# Altium PCB 9-123-305-Ivchenko.PcbDoc
Units mil, origin at the board's own origin, x right, y up, seen from the top; angles counter-clockwise.
Board outline 5062.99 x 2822.83 mil, 2 copper layers (Top Layer, Top, Bottom Layer, Bottom); 17 components, 11 nets, 61 pads, 23 vias.
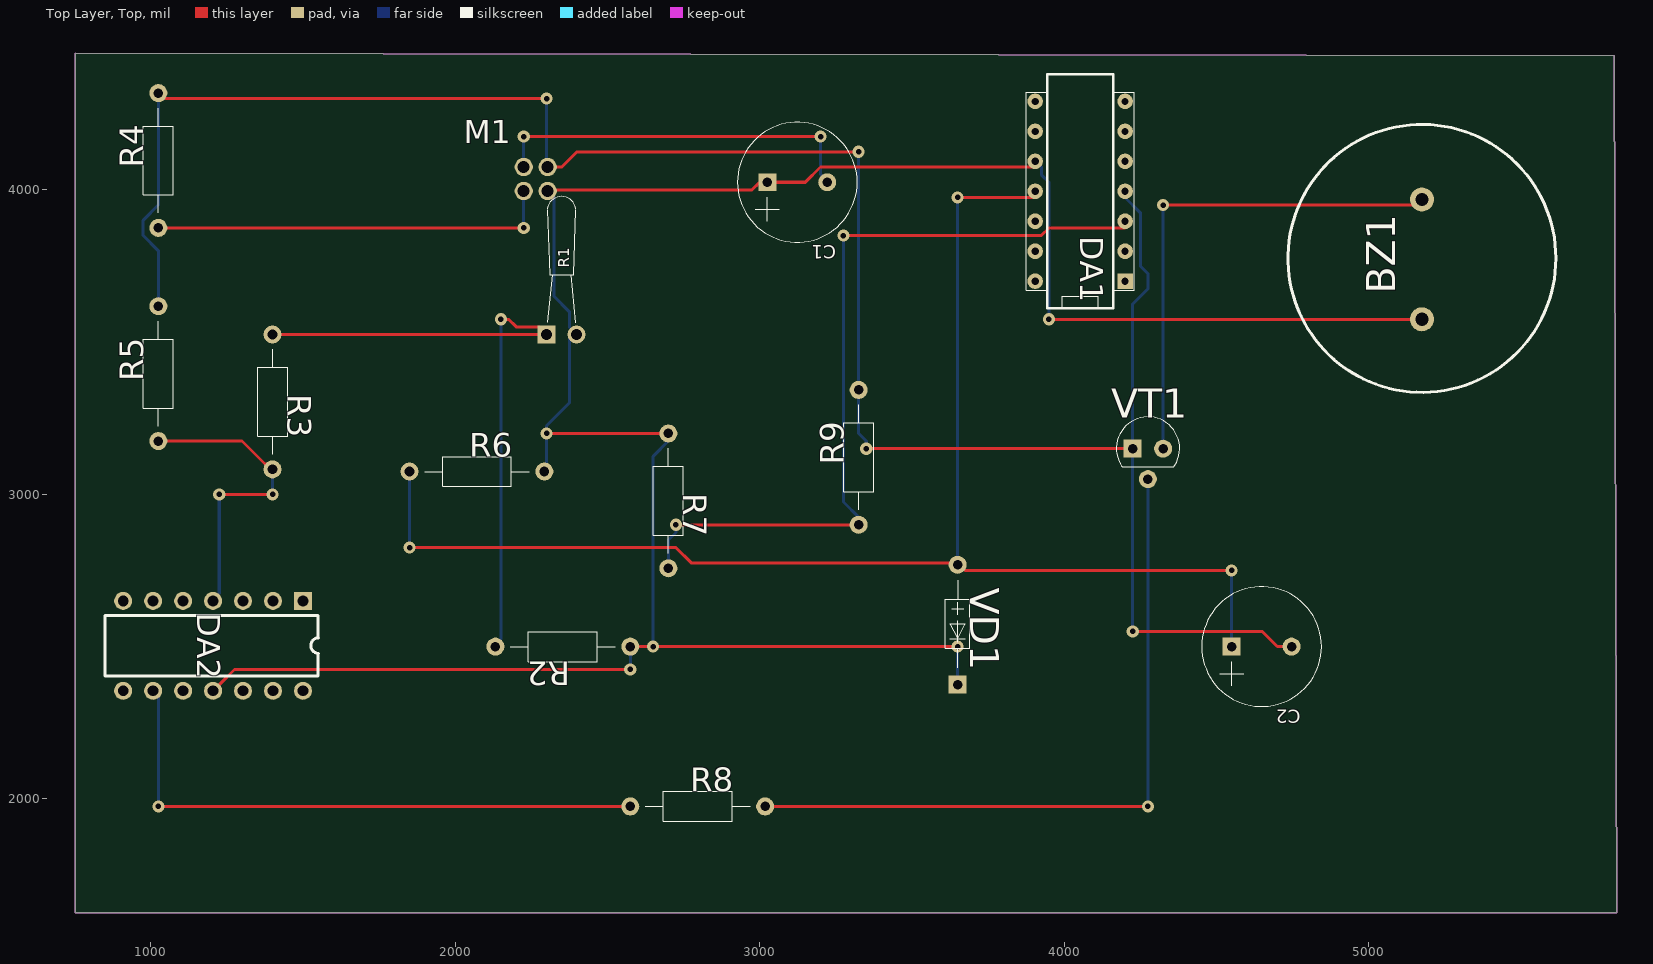
[diagram p0: Top Layer, Top view]
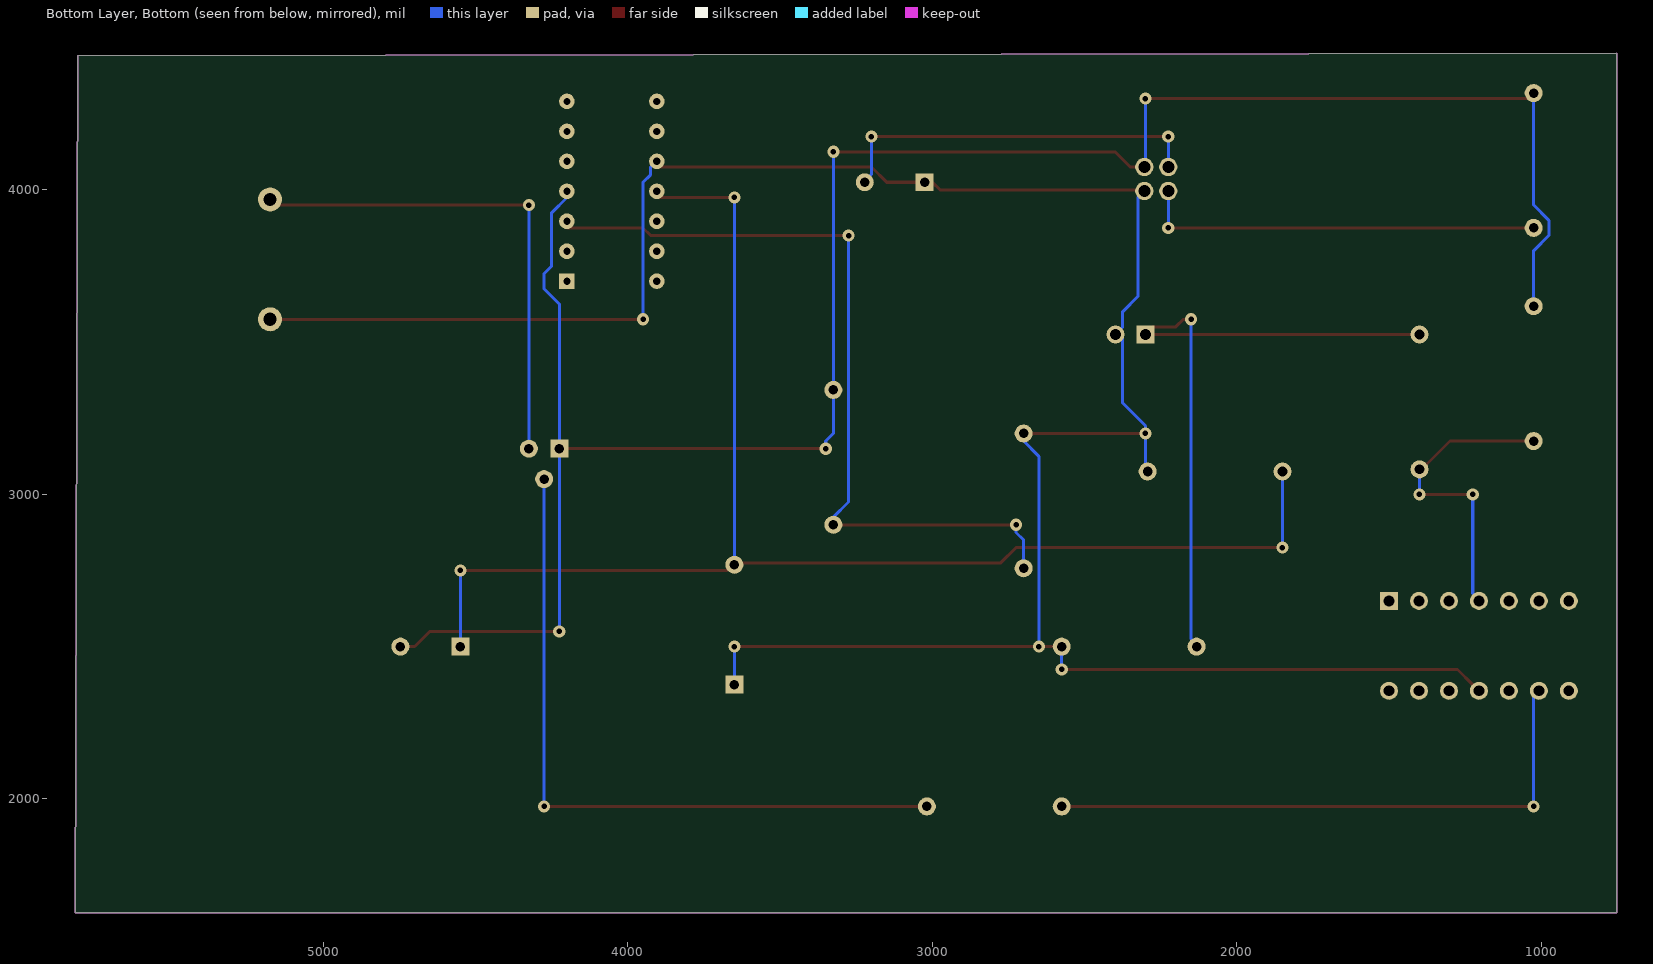
[diagram p1: Bottom Layer, Bottom view, seen from below]

## Layer stack, top to bottom
Top Solder, Top Mask: solder mask 0.4, Solder Resist, Dk 3.5
Top Layer, Top: signal copper 1.4
Dielectric 1: dielectric 12.6, FR-4, Dk 4.8
Bottom Layer, Bottom: signal copper 1.4
Bottom Solder, Bot Mask: solder mask 0.4, Solder Resist, Dk 3.5

## Board outline
751.97,4448.82 751.97,1625.98 5814.96,1625.98 5807.09,4440.94

## Design rules (kind name [scope] priority, off if disabled: settings)
Clearance Clearance_1 [All] p1: gap=10 ignorepadtopadclearanceinfootprint=FALSE
Clearance [All] p2: gap=10 ignorepadtopadclearanceinfootprint=FALSE except(12: Arc-Arc Arc-Track Arc-THPad Arc-Via Track-Track Track-THPad Track-Via THPad-THPad THPad-Via Via-Via)
PlaneClearance [All] p1: clearance=10
PolygonConnect [All] p1: connectstyle=Relief reliefconductorwidth=10 reliefentries=4 polygonreliefangle="90 Angle" airgapwidth=10
RoutingVias [All] p1: holewidth=28 width=50 viastyle="Through Hole" minholewidth=28 minwidth=50 maxholewidth=28 maxwidth=50
SolderMaskExpansion [All] p1: expansion=4 istentingtop=FALSE
Width [All] p1: maxlimit=10 minlimit=10 preferedwidth=10
29 further rules are at their usual default settings.

## Components (designator, comment, footprint, x,y, rotation, side; value= is the part's Value field where it differs from the comment)
BZ1 "KPI-4332" ZUM1 5175,3575 r90 top
C1 "" ECR-16В-1000МКФ 3025,4025 r180 top
C2 "" ECR-16В-1000МКФ 4550,2500 r180 top
DA1 "" 201.14-1 4200,3700 r270 top
DA2 "" DIP14 1500,2650 r270 top
M1 "" GAS 2225,4075 r0 top
R1 "4.7k" B57861 2300,3525 r0 top
R2 "11k" C2-33H-0.125W 2575,2500 r180 top
R3 "750" C2-33H-0.125W 1400,3525 r270 top
R4 "12k" C2-33H-0.125W 1025,3875 r90 top
R5 "5,6k" C2-33H-0.125W 1025,3175 r90 top
R6 "1,5M" C2-33H-0.125W 1850,3075 r0 top
R7 "47k" C2-33H-0.125W 2700,3200 r270 top
R8 "3k" C2-33H-0.125W 2575,1975 r0 top
R9 "" C2-33H-0.125W 3325,2900 r90 top
VD1 "" КД521(522)_КД521Б(Primary) 3650,2375 r270 top
VT1 "KT503B" TO-92-1 4225,3150 r0 top

## Footprints (in the part's own frame and the unit in brackets; to place one, negate y for a bottom-side part, rotate by r counter-clockwise, add the part's x,y. Pads: shape width x height; smd on the part's side, far side on the other; paste and mask are expansions set on the pad)
201.14-1 [mm]
  rect 1.3x1.3 hole 0.6: 1(0,0)
  round 1.3 hole 0.6: 2(-2.5,0) 3(-5,0) 4(-7.5,0) 5(-10,0) 6(-12.5,0) 7(-15,0) 8(-15,-7.5) 9(-12.5,-7.5) 10(-10,-7.5) 11(-7.5,-7.5) 12(-5,-7.5) 13(-2.5,-7.5) 14(0,-7.5)
  silkscreen extent -17.25,-8.25 2.25,0.75
B57861 [mm]
  rect 1.5x1.5 hole 0.9: 1(0,0)
  round 1.5 hole 0.9: 2(2.5,0)
  silkscreen extent 0.05,0.98 2.45,11.52
C2-33H-0.125W [mm]
  round 1.5 hole 0.8: 1(0,0) 2(11.25,0)
  silkscreen extent 1.25,-1.25 10,1.25
DIP14 [mm]
  rect 1.5x1.5 hole 0.9: 1(0,0)
  round 1.5 hole 0.9: 2(0,-2.5) 3(0,-5) 4(0,-7.5) 5(0,-10) 6(0,-12.5) 7(0,-15) 8(7.5,-15) 9(7.5,-12.5) 10(7.5,-10) 11(7.5,-7.5) 12(7.5,-5) 13(7.5,-2.5) 14(7.5,0)
  silkscreen extent 1.22,-16.5 6.27,1.3
ECR-16В-1000МКФ [mm]
  rect 1.5x1.5 hole 0.8: 1(0,0)
  round 1.5 hole 0.8: 2(-5,0)
  silkscreen extent -7.5,-5 2.5,5
GAS [mil]
  round 60 hole 39.37: 1(0,0) 2(78.74,0) 3(0,-78.74) 4(78.74,-78.74)
TO-92-1 [mm]
  rect 1.5x1.5 hole 0.8: 1(0,0)
  round 1.5 hole 0.8: 2(1.27,-2.54) 3(2.54,0)
  silkscreen extent -1.35,-1.5 3.92,2.65
ZUM1 [mm]
  round 2 hole 1.1: 1(0,0) 2(10,0)
  silkscreen extent -6.1,-11.18 16.26,11.17
КД521(522)_КД521Б(Primary) [mm]
  round 1.5 hole 0.8: 1(-10,0)
  rect 1.5x1.5 hole 0.8: 2(0,0)
  silkscreen extent -8.71,-1.02 -1.4,1.02

## Via types
v1: diameter 40, hole 18, Top Layer, Top to Bottom Layer, Bottom, 23 vias

## Nets (pads, with @x,y where several pads share a name; then routed paths per layer and width w, separated by ;. In a path a pad name is that pad's centre, name@x,y a point inside that pad or via, vN(x,y) a via of type N, cw(c..) or ccw(c..) an arc to the next point about the centre after c; other vN are vias at no path point)
+5B: BZ1.1 C1.1 DA1.10 DA2.11 M1.4 R1.2 R2.1 R6.2 R7.1 VD1.2 | length 8220.5
  Top Layer, Top w10: DA2.11 1225,2375 1275,2425 v1(2575,2425) ; v1(2300,3200) R7.1 ; M1.4 2325,4000 2975,4000 3000,4025 C1.1 3150,4025 3200,4075 3900,4075 DA1.10 ; R2.1 v1(2650,2500) v1(3650,2500) ; v1(3950,3575) BZ1.1
  Bottom Layer, Bottom w10: R6.2 2300,3100 v1(2300,3200) 2300,3225 2375,3300 2375,3525 R1.2 2375,3550 2375,3600 2325,3650 2325,3975 M1.4 ; v1(2575,2425) R2.1 ; v1(2650,2500) 2650,3125 2700,3175 R7.1 ; VD1.2 v1(3650,2500) ; DA1.10 3925,4075 3925,4050 3950,4025 v1(3950,3575)
GND: C2.2 DA1.4 M1.2 R4.2 R5.2 R9.2 VT1.1 | length 7189.4
  Top Layer, Top w10: R4.2 1050,4300 v1(2300,4300) ; M1.2 2325,4075 2350,4075 2400,4125 v1(3325,4125) ; v1(3350,3150) VT1.1 ; v1(4225,2550) 4650,2550 4700,2500 4725,2500 C2.2
  Bottom Layer, Bottom w10: R5.2 1025,3625 1025,3800 975,3850 975,3900 1025,3950 1025,4300 R4.2 ; v1(2300,4300) 2300,4100 M1.2 ; v1(3325,4125) 3325,3350 R9.2 3325,3325 3325,3200 3350,3175 v1(3350,3150) ; DA1.4 4200,3975 4250,3925 4250,3750 4275,3725 4275,3675 4225,3625 VT1.1 v1(4225,2550)
NET00000: C1.2 M1.1 | length 1233.2
  Top Layer, Top w10: v1(2225,4175) v1(3200,4175)
  Bottom Layer, Bottom w10: M1.1 v1(2225,4175) ; v1(3200,4175) 3200,4050 C1.2
NET00002: R8.2 VT1.2 | length 2332.1
  Top Layer, Top w10: R8.2 3025,1975 v1(4275,1975)
  Bottom Layer, Bottom w10: v1(4275,1975) VT1.2
NET00003: BZ1.2 VT1.3 | length 1668.7
  Top Layer, Top w10: v1(4325,3950) 5175,3950 BZ1.2
  Bottom Layer, Bottom w10: VT1.3 v1(4325,3950)
NET00004: DA2.9 R8.1 | length 1942.8
  Top Layer, Top w10: v1(1025,1975) R8.1
  Bottom Layer, Bottom w10: DA2.9 1025,2350 v1(1025,1975)
NET00005: R1.1 R2.2 R3.1 | length 2151.5
  Top Layer, Top w10: R3.1 R1.1 2275,3550 2200,3550 2175,3575 v1(2150,3575)
  Bottom Layer, Bottom w10: R2.2 2150,2525 v1(2150,3575)
NET00006: DA2.4 R3.2 R5.1 | length 1038.3
  Top Layer, Top w10: R5.1 1300,3175 1375,3100 1400,3100 R3.2 ; v1(1225,3000) v1(1400,3000)
  Bottom Layer, Bottom w10: DA2.4 1225,2675 v1(1225,3000) ; v1(1400,3000) 1400,3075 R3.2
NET00008: M1.3 R4.1 | length 1321.3
  Top Layer, Top w10: R4.1 v1(2225,3875)
  Bottom Layer, Bottom w10: v1(2225,3875) 2225,3975 M1.3
NET00010: DA1.3 R7.2 R9.1 | length 2681.2
  Top Layer, Top w10: v1(2725,2900) R9.1 ; v1(3275,3850) 3925,3850 3950,3875 4200,3875 DA1.3
  Bottom Layer, Bottom w10: R7.2 2700,2775 2700,2850 2725,2875 v1(2725,2900) ; v1(3275,3850) 3275,2975 3325,2925 R9.1
NET00016: C2.1 DA1.11 R6.1 VD1.1 | length 4710.3
  Top Layer, Top w10: v1(1850,2825) 2725,2825 2775,2775 3650,2775 VD1.1 3675,2750 v1(4550,2750) ; v1(3650,3975) 3900,3975 DA1.11
  Bottom Layer, Bottom w10: v1(1850,2825) R6.1 ; VD1.1 3650,2775 v1(3650,3975) ; C2.1 v1(4550,2750)
pads on no net: DA1.1 DA1.2 DA1.5 DA1.6 DA1.7 DA1.8 DA1.9 DA1.12 DA1.13 DA1.14 DA2.1 DA2.2 DA2.3 DA2.5 DA2.6 DA2.7 DA2.8 DA2.10 DA2.12 DA2.13 DA2.14

## Keep-outs
Keep-Out Layer, Board:
  the board outline again, w5

## Text inside footprints (layer, text, board x,y; h text height)
VT1: Mechanical 1, Top Assy "C" at 4315.16,3181.1 h12.3; Mechanical 1, Top Assy "E" at 4197.05,3181.1 h12.3; Mechanical 1, Top Assy "BASE" at 4254.53,3100.79 h12.3